# Altium PCB W5200_Evaluation.PcbDoc
Units mil, origin at the board's own origin, x right, y up, seen from the top; angles counter-clockwise.
Board outline 4000 x 4000 mil, 2 copper layers (Top Layer, Bottom Layer); 9 components, 10 nets, 69 pads, 0 vias.
Unrouted connection lines stored in the file: 32.
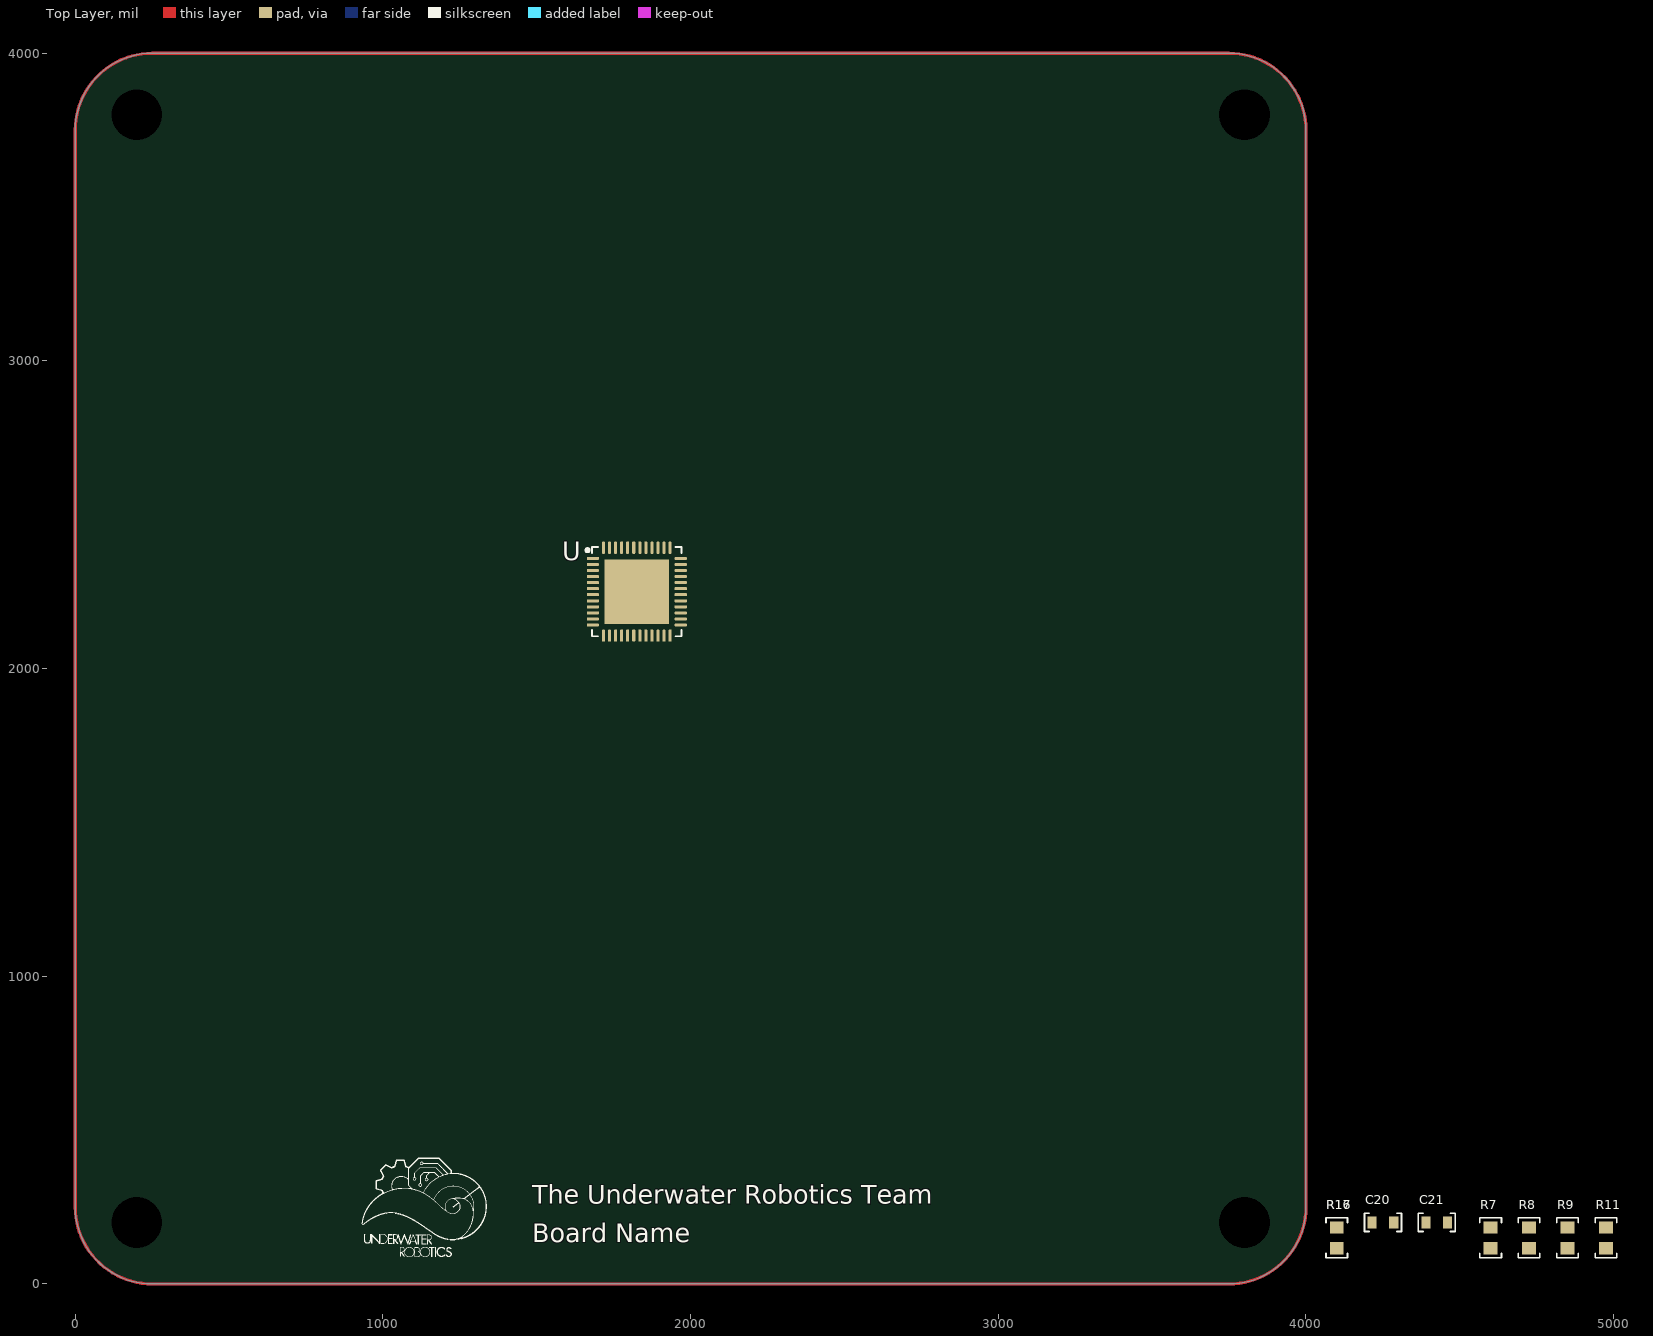
[diagram p0: Top Layer view]
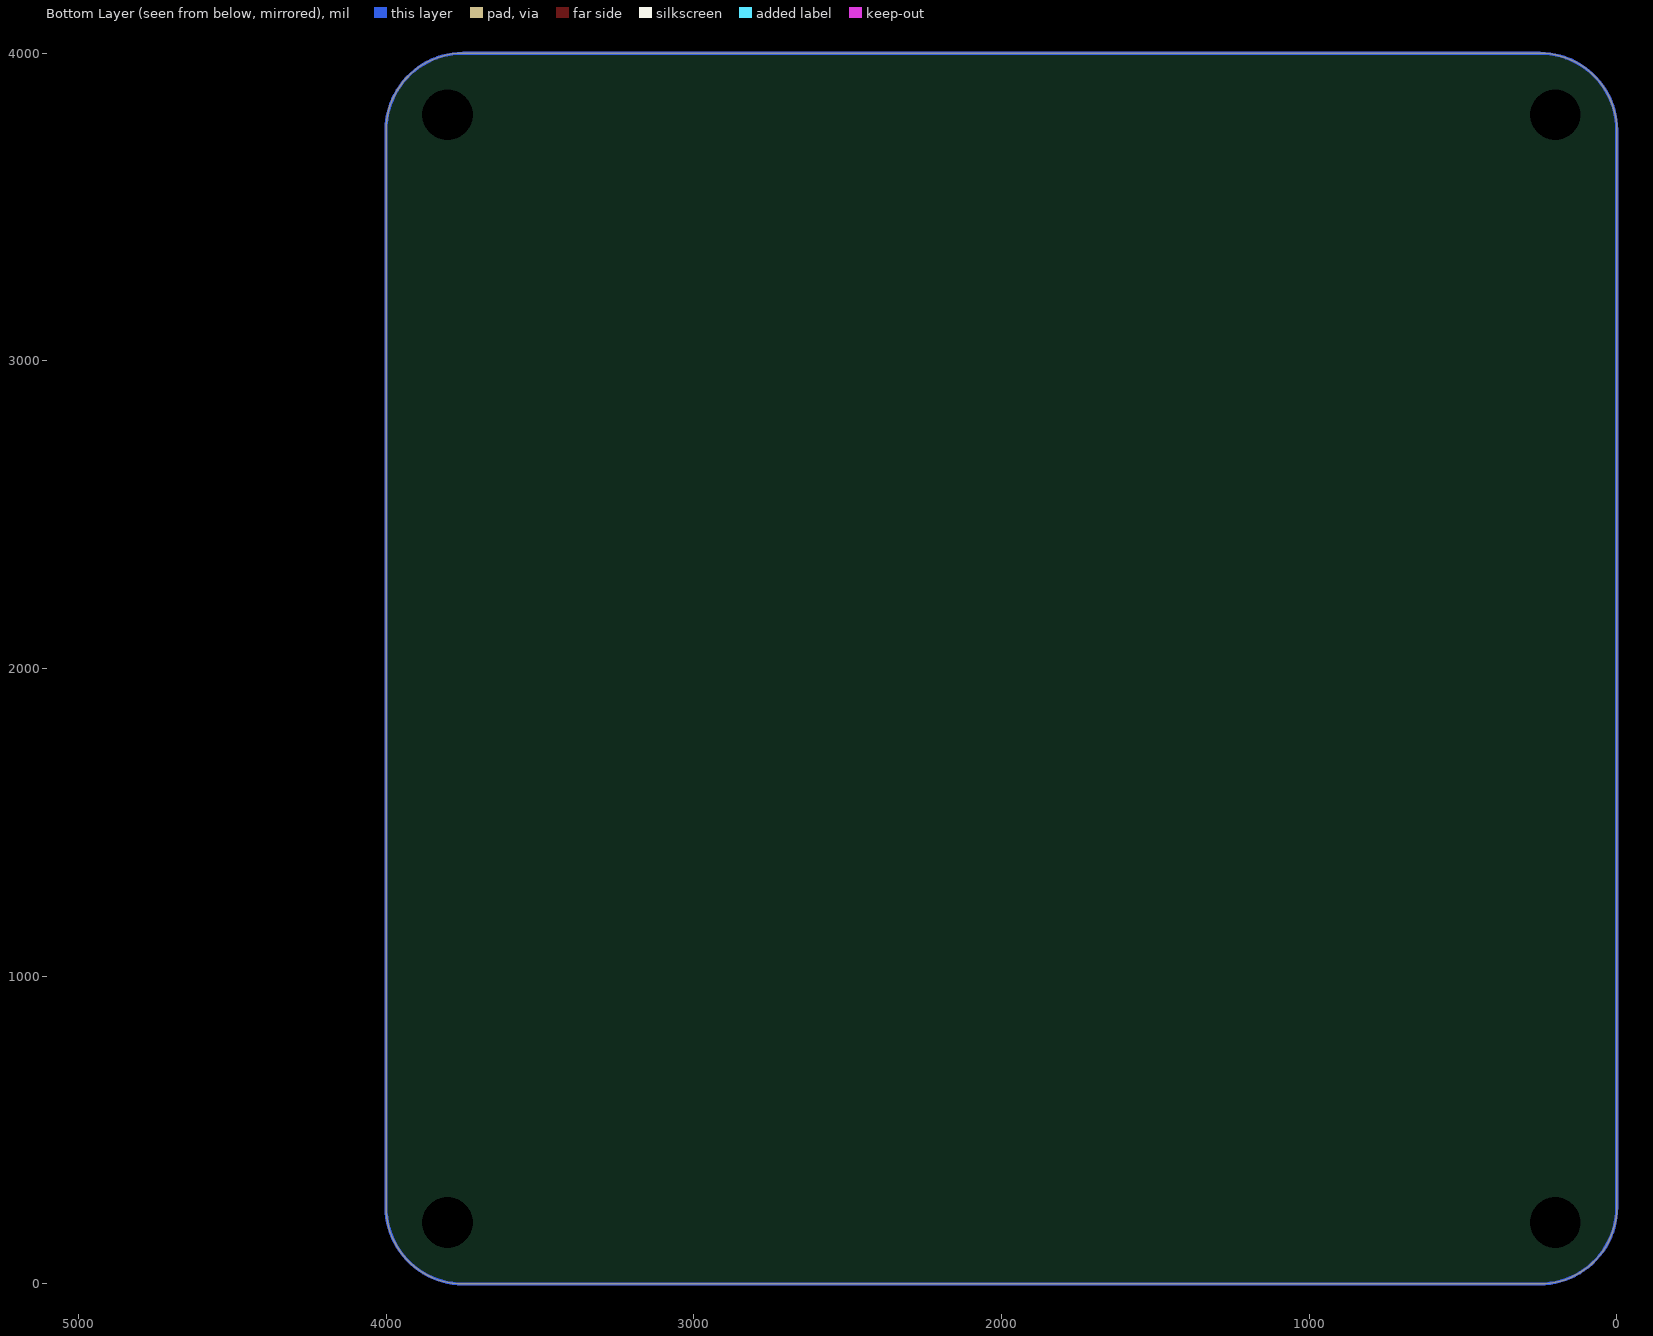
[diagram p1: Bottom Layer view, seen from below]

## Layer stack, top to bottom
Top Solder: solder mask 0.4, Solder Resist, Dk 3.5
Top Layer: signal copper 1.4
Dielectric 1: dielectric 12.6, FR-4, Dk 4.8
Bottom Layer: signal copper 1.4
Bottom Solder: solder mask 0.4, Solder Resist, Dk 3.5

## Board outline
0,250 0,3750 cw(c250,3750) 250,4000 3750,4000 cw(c3750,3750) 4000,3750 4000,250 cw(c3750,250) 3750,0 250,0 cw(c250,250)

## Design rules (kind name [scope] priority, off if disabled: settings)
Clearance [All] p1: gap=10 ignorepadtopadclearanceinfootprint=FALSE except(0: Arc-Hole Track-Hole SMDPad-Hole THPad-Hole Via-Hole Fill-Hole Poly-Hole Region-Hole Text-Hole)
PolygonConnect [All] p1: connectstyle=Relief reliefconductorwidth=10 reliefentries=4 polygonreliefangle="90 Angle" airgapwidth=10
RoomDefinition W5200_Evaluation_Sheet [InComponentClass('W5200_Evaluation_Sheet')] p1: confinementstyle=ConfineIn formatcopy=TRUE lockcomponents=FALSE outline 4050,75 5025,75 5025,300 4050,300
RoutingVias [All] p1: holewidth=28 width=50 viastyle="Through Hole" minholewidth=28 minwidth=50 maxholewidth=28 maxwidth=50
SolderMaskExpansion [All] p1: expansion=4 istentingtop=FALSE
Width [All] p1: maxlimit=10 minlimit=10 preferedwidth=10
30 further rules are at their usual default settings.

## Components (designator, comment, footprint, x,y, rotation, side; value= is the part's Value field where it differs from the comment)
C20 "100nF Ceramic 6.3V" CAPACITOR_0603 4250,200 r0 top value=0.1uF
C21 "10uF Ceramic 6.3V" CAPACITOR_0603 4425,200 r0 top
R7 "10k Ohm 5% 1/10W" RESISTOR_0603 4600,150 r90 top
R8 "10k Ohm 5% 1/10W" RESISTOR_0603 4725,150 r90 top
R9 "10k Ohm 5% 1/10W" RESISTOR_0603 4850,150 r90 top
R11 "10k Ohm 5% 1/10W" RESISTOR_0603 4975,150 r90 top
R16 "1M" RESISTOR_0603 4100,150 r90 top
R17 "K / 1%" RESISTOR_0603 4100,150 r90 top
U "W5200" QFN-48 1825,2250 r90 top

## Footprints (in the part's own frame and the unit in brackets; to place one, negate y for a bottom-side part, rotate by r counter-clockwise, add the part's x,y. Pads: shape width x height; smd on the part's side, far side on the other; paste and mask are expansions set on the pad)
CAPACITOR_0603 [mil] "CAPACITOR 0603"
  rect 30x40 smd: 1(-35,0) 2(35,0)
  silkscreen extent -60,-30 60,30, body extent -31,-16 32,16, height 31
QFN-48 [mm] "48 pin QFN package, 7x7mm, 0.5mm pitch"
  rrect50% 0.25x1 smd: 1(2.75,3.63) 2(2.25,3.63) 3(1.75,3.63) 4(1.25,3.63) 5(0.75,3.63) 6(0.25,3.63) 7(-0.25,3.63) 8(-0.75,3.63) 9(-1.25,3.63) 10(-1.75,3.63) 11(-2.25,3.63) 12(-2.75,3.63) 25(-2.75,-3.63) 26(-2.25,-3.63) 27(-1.75,-3.63) 28(-1.25,-3.63) 29(-0.75,-3.63) 30(-0.25,-3.63) 31(0.25,-3.63) 32(0.75,-3.63) 33(1.25,-3.63) 34(1.75,-3.63) 35(2.25,-3.63) 36(2.75,-3.63)
  rrect50% 1x0.25 smd: 13(-3.63,2.75) 14(-3.63,2.25) 15(-3.63,1.75) 16(-3.63,1.25) 17(-3.63,0.75) 18(-3.63,0.25) 19(-3.63,-0.25) 20(-3.63,-0.75) 21(-3.63,-1.25) 22(-3.63,-1.75) 23(-3.63,-2.25) 24(-3.63,-2.75) 37(3.63,-2.75) 38(3.63,-2.25) 39(3.63,-1.75) 40(3.63,-1.25) 41(3.63,-0.75) 42(3.63,-0.25) 43(3.63,0.25) 44(3.63,0.75) 45(3.63,1.25) 46(3.63,1.75) 47(3.63,2.25) 48(3.63,2.75)
  rect 5.3x5.3 smd: 49(0,0)
  silkscreen extent -3.68,-3.68 3.68,4.19, body extent -3.51,-3.51 3.5,3.5, height 0.84
RESISTOR_0603 [mil] "Resistor 0603"
  rect 40x45 smd: 1(-33.5,0) 2(33.5,0)
  silkscreen extent -65,-35 65,35, body extent -31,-16 32,16, height 16

## Part data
C20: library part CAPACITOR_0.1uF_0603, "Cap 100nF 6.3V +/-10% / Ceramic 0603", Supplier Part Number 1=399-15351-1-ND, Tolerance="+/- 10%", Voltage=6.3V, ComponentLink1Description=Datsheet, ComponentLink1URL=https://www.mouser.com/datasheet/2/212/KEM_C1002_X7R_SMD-1102033.pdf, Made By="Flip B", Supplier 1=Digi-Key
C21: library part CAPACITOR_10uF_0603, "Cap 10uF 6.3V +/-20% / Ceramic 0603", Supplier Part Number 1=1276-1119-1-ND, Tolerance="+/- 20%", Value (uF)=10uF, Voltage=6.3V, ComponentLink1Description=Digikey, ComponentLink1URL=https://www.digikey.com/en/products/detail/samsung-electro-mechanics/CL10A106MQ8NNNC/3886777, Made By="Flip B", Supplier 1=Digi-Key
R7 R8 R9 R11: library part RESISTOR_10K_0603, "RES 10k OHM 5% 1/10W 0603", Digikey Part Numer=CR0603-JW-104ELFTR-ND, Supplier Part Number 1=2019-RK73B1JTTD103JCT-ND, Tolerance="+/- 5%", Value  (Ohms)=10K, ComponentLink1Description=Datasheet, ComponentLink1URL=https://www.bourns.com/docs/product-datasheets/CRxxxxx.pdf, Made By="Robert Pafford", Supplier=Digikey, Supplier 1=Digi-Key, Wattage=1/8W
R16: library part RESISTOR_1M_0603_1, "RES 1M OHM 1/8W 0603", Digikey Part Numer=CR0603-JW-104ELFTR-ND, Supplier Part Number 1=RMCF0603JT1M00CT-ND, Tolerance="+/- 5%", ComponentLink1Description=Datasheet, ComponentLink1URL=https://www.bourns.com/docs/product-datasheets/CRxxxxx.pdf, Made By="Robert Pafford", Supplier=Digikey, Supplier 1=Digi-Key, Value  (Ohms)=1M, Wattage=1/8W
R17: library part "RESISTOR_28.7K / 1%_0603_1", "RES 28.7K OHM 1% 1/8W 0603", Digikey Part Numer=CR0603-JW-104ELFTR-ND, Supplier Part Number 1=541-28.7KHCT-ND, Tolerance="+/- 5%", Value  (Ohms)="28.7K / 1%", ComponentLink1Description=Datasheet, ComponentLink1URL=https://www.bourns.com/docs/product-datasheets/CRxxxxx.pdf, Made By="Robert Pafford", Supplier=Digikey, Supplier 1=Digi-Key, Wattage=1/8W
U: "WIZNET W5200 / 48QFN (7x7 mm)", Package="SOT-223-4 Texas Instruments", Supplier Part Number 1=950-W5200, Arrow_Electronics-Purchase-URL=https://snapeda.com/shop?store=Arrow+Electronics&id=410186, Availability=Good, ComponentLink1Description=Datasheet, ComponentLink1URL=https://www.wiznet.io/product-item/w5200/, Created by=Siddharth.V, DigiKey-Purchase-URL=https://snapeda.com/shop?store=DigiKey&id=410186, MF="Texas Instruments", Mouser-Purchase-URL=https://snapeda.com/shop?store=Mouser&id=410186, MP=LM1117IMPX-3.3/NOPB, Price=None, SnapEDA_Link=https://www.snapeda.com/parts/LM1117IMPX-3.3/NOPB/Texas%20Instruments/view-part/410186/?ref=snap, Supplier 1=Mouser, Texas_Instruments-Purchase-URL=https://snapeda.com/shop?store=Texas+Instruments&id=410186

## Free pads (board coordinates)
  round 60 hole 165: 1(200,200) 1(200,3800) 1(3800,200) 1(3800,3800)

## Nets (pads, with @x,y where several pads share a name; then routed paths per layer and width w, separated by ;. In a path a pad name is that pad's centre, name@x,y a point inside that pad or via, vN(x,y) a via of type N, cw(c..) or ccw(c..) an arc to the next point about the centre after c; other vN are vias at no path point)
GND: C20.2 C21.2 R17.2 U.9 U.10 U.13 U.19 U.22 U.24 U.26 U.28 U.32 U.33 U.34 U.35 U.36 U.37 U.38 U.39 U.48 U.49
NetC20_1: C20.1 C21.1 U.16
NetR7_1: R7.1 R8.1 R9.1 R11.1
NetR7_2: R7.2 U.5
NetR8_2: R8.2 U.4
NetR9_2: R9.2 U.3
NetR11_2: R11.2 U.6
NetR16_1: R16.1 U.1
NetR16_2: R16.2 U.2
NetR17_1: R17.1 U.12
pads on no net: U.7 U.8 U.11 U.14 U.15 U.17 U.18 U.20 U.21 U.23 U.25 U.27 U.29 U.30 U.31 U.40 U.41 U.42 U.43 U.44 U.45 U.46 U.47

## Other copper
Multi-Layer:
  the board outline again, w10

## Silkscreen, mask and mechanical layers (free items; w line width, h text height)
Top Overlay:
  drawing of 19 lines, arcs and shapes, not listed
  text "The Underwater Robotics Team" at 1485,260 h60
  text "Board Name" at 1485,135 h60